# Altium PCB treehopper-mini.PcbDoc
Units mil, origin at the board's own origin, x right, y up, seen from the top; angles counter-clockwise.
Board outline 380 x 800 mil, 2 copper layers (Top Layer, Bottom Layer), stack 34.3 mil thick; 14 components, 21 nets, 94 pads, 39 vias.
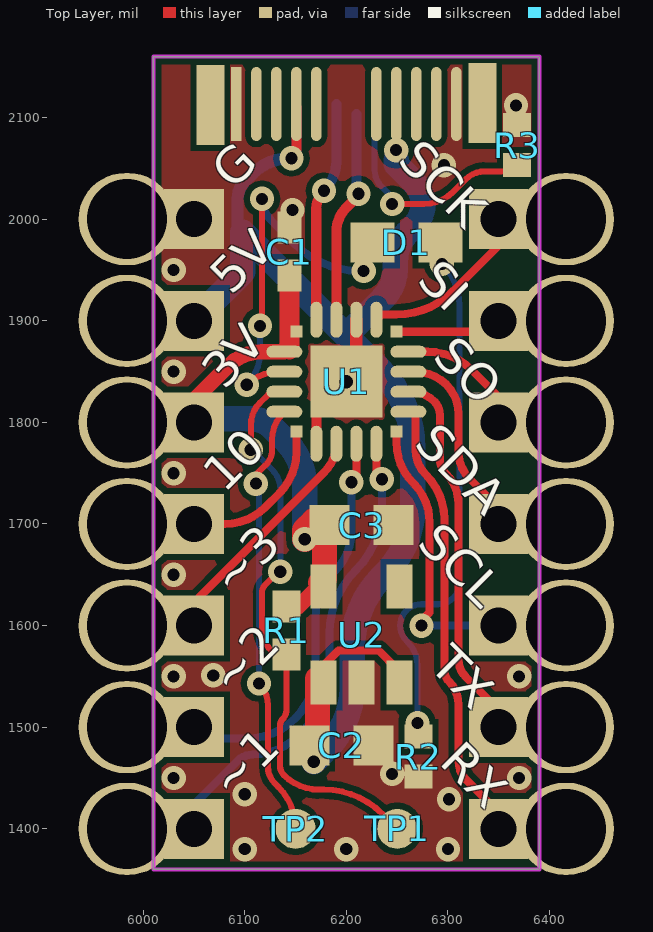
[diagram p0: Top Layer view]
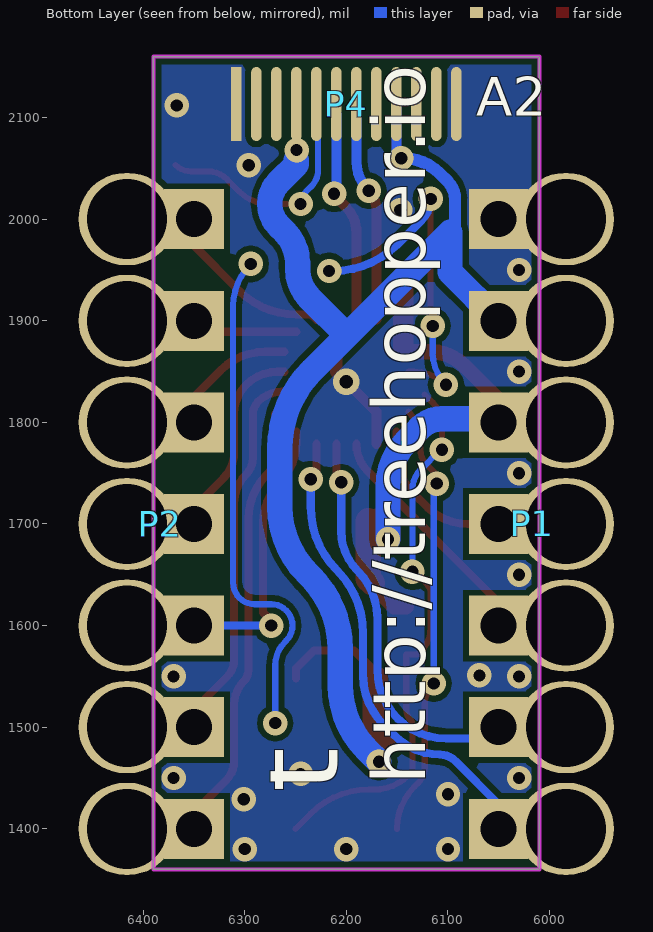
[diagram p1: Bottom Layer view, seen from below]

## Layer stack, top to bottom
Top Solder: solder mask 0.4, Solder Resist, Dk 3.5
Top Layer: signal copper 1.4
Dielectric 1: dielectric 31.5, FR-4, Dk 4.8
Bottom Layer: signal copper 1.4
Bottom Solder: solder mask 0.4, Solder Resist, Dk 3.5

## Board outline
6010,1360 6390,1360 6390,2160 6010,2160

## Design rules (kind name [scope] priority, off if disabled: settings)
Clearance [All] p1: gap=6
ComponentClearance [All] p1: gap=0 collisioncheckmode=3 verticalgap=0 showdistances=FALSE
DiffPairsRouting [All] p1: maxlimit=10 minlimit=6 mostfreqgap=10 toplayer_minwidth=6 toplayer_maxwidth=15 toplayer_prefwidth=8 bottomlayer_minwidth=6 bottomlayer_maxwidth=15 bottomlayer_prefwidth=8 maxuncoupledlength=500
HoleSize [All] p1: absolutevalues=TRUE maxlimit=500 minlimit=12 maxpercent=80.000 minpercent=20.000
HoleToHoleClearance [All] p1: gap=0 allowstackedmicrovias=TRUE
MinimumSolderMaskSliver [All] p1: minsoldermaskwidth=0
PlaneConnect [All] p1: planeconnectstyle=Direct reliefexpansion=20 reliefentries=4 reliefconductorwidth=10 reliefairgap=10
PolygonConnect [All] p1: connectstyle=Direct reliefconductorwidth=10 reliefentries=4 polygonreliefangle="90 Angle" airgapwidth=10
RoutingVias [All] p1: holewidth=12 width=24 viastyle="Through Hole" minholewidth=12 minwidth=24 maxholewidth=28 maxwidth=50
SilkToSilkClearance [All] p1: silktosilkclearance=0
SilkToSolderMaskClearance [IsPad] p1: minsilkscreentomaskgap=0 clearancetoexposedcopper=TRUE
SolderMaskExpansion [All] p1: expansion=0
Width [All] p1: maxlimit=500 minlimit=6 preferedwidth=8
22 further rules are at their usual default settings.

## Classes and differential pairs
differential pair USB_D: +USB_D_P -USB_D_N

## Components (designator, comment, footprint, x,y, rotation, side; value= is the part's Value field where it differs from the comment)
C1 "100n" CAPC1005N 6144,1968 r270 top
C2 "4u7" CAPC1608N 6195,1482 r180 top
C3 "10u" CAPC1608N 6215,1699 r180 top
D1 "GREEN" LTST-C190GKT_NO_SILK 6259,1977 r0 top
P1 "Header 7" HDR1X7_CASTELATED 6050,1400 r90 bottom
P2 "Header 7" HDR1X7_CASTELATED 6350,2000 r270 bottom
P4 "12401562E4#2A" 12401562E4#2A 6200,2195 r0 bottom
R1 "1k" RESC1005N#1 6141,1595 r90 top
R2 "1k" RESC1005N#2 6271,1471 r90 top
R3 "5k1" RESC1005N#2 6368,2073 r270 top
TP1 "TESTPOINT" TESTPOINT100 6250,1400 r0 top
TP2 "TESTPOINT" TESTPOINT100 6150,1400 r0 top
U1 "EFM8UB10F16G-B-QFN20" QFN50P300X300X90-20N-NO-SILK 6200,1840 r270 top
U2 "AP2112K-3.3" SOT23-5AN-no-silk 6215,1591 r90 top

## Footprints (in the part's own frame and the unit in brackets; to place one, negate y for a bottom-side part, rotate by r counter-clockwise, add the part's x,y. Pads: shape width x height; smd on the part's side, far side on the other; paste and mask are expansions set on the pad)
12401562E4#2A [mm]
  rect 0.26x1.85 smd: A1(2.75,2.075)
  oval 0.26x1.85 smd: A2(2.25,2.075) A3(1.75,2.075) A4(1.25,2.075) A5(0.75,2.075) A6(0.25,2.075) A7(-0.25,2.075) A8(-0.75,2.075) A9(-1.25,2.075) A10(-1.75,2.075) A11(-2.25,2.075) A12(-2.75,2.075)
  rect 0.26x1.85 smd far side: B1(-2.75,2.075)
  oval 0.26x1.85 smd far side: B2(-2.25,2.075) B3(-1.75,2.075) B4(-1.25,2.075) B5(-0.75,2.075) B8(0.75,2.075) B9(1.25,2.075) B10(1.75,2.075) B11(2.25,2.075) B12(2.75,2.075)
  rect 0.7x2 smd far side: MH1(3.4,2.05) MH2(-3.4,2.1)
  body extent -4.5,-9.8 4.5,5.8, height 1.05
CAPC1005N [mm] "Chip Capacitor (0402), Body 1.0x0.5mm, IPC Medium Density"
  rect 0.8x0.6 smd: 1(-0.6,0) 2(0.6,0)
  body extent -0.5,-0.3 0.5,0.3, height 0.2
CAPC1608N [mm] "Chip Capacitor (0603), Body 1.6x0.8mm, IPC Medium Density"
  rect 1x1 smd: 1(-0.8,0) 2(0.8,0)
  body extent -1,-0.39 1,0.39, height 0.79
HDR1X7_CASTELATED [mil] "Connector; Header; 7 Position"
  oval 90.55x95 hole 78.74: 1(0,-66) 2(100,-66) 3(200,-66) 4(300,-66) 5(400,-66) 6(500,-66) 7(600,-66)
  rect 59x59 hole 35.43: 1(0,0) 2(100,0) 3(200,0) 4(300,0) 5(400,0) 6(500,0) 7(600,0)
LTST-C190GKT_NO_SILK [mm] "Blue LED, 0603"
  rect 1.1x1 smd: 1(-0.85,0) 2(0.85,0)
  body extent -0.85,-0.45 0.85,0.45, height 0.9
QFN50P300X300X90-20N-NO-SILK [mm] "QFN, 16+4 Leads, Body 3.00x3.00mm, Pitch 0.50mm, IPC Medium Density"
  rect 0.3x0.3 smd: 1(-1.25,1.25) 6(-1.25,-1.25) 11(1.25,-1.25) 16(1.25,1.25)
  oval 0.9x0.3 smd: 2(-1.55,0.75) 3(-1.55,0.25) 4(-1.55,-0.25) 5(-1.55,-0.75) 12(1.55,-0.75) 13(1.55,-0.25) 14(1.55,0.25) 15(1.55,0.75)
  oval 0.3x0.9 smd: 7(-0.75,-1.55) 8(-0.25,-1.55) 9(0.25,-1.55) 10(0.75,-1.55) 17(0.75,1.55) 18(0.25,1.55) 19(-0.25,1.55) 20(-0.75,1.55)
  rect 1.8x1.8 smd mask+0: 21(0,0)
  body extent -1.5,-1.5 1.5,1.5, height 0.92
RESC1005N#1 [mm] "Chip Resistor, Body 1.1x0.5mm, IPC Medium Density"
  rect 0.8x0.7 smd: 1(-0.6,0) 2(0.6,0)
  body extent -0.5,-0.25 0.5,0.25, height 0.38
RESC1005N#2 [mm] "Chip Resistor, Body 1.1x0.5mm, IPC Medium Density"
  rect 0.6x0.7 smd: 1(-0.5,0) 2(0.5,0)
  body extent -0.5,-0.25 0.5,0.25, height 0.38
SOT23-5AN-no-silk [mm] "SOT23, 5-Leads, Body 2.9x1.6mm, Pitch 0.95mm, Lead Span 2.8mm, IPC Medium Density"
  rect 1.1x0.65 smd: 1(-1.2,0.95) 2(-1.2,0) 3(-1.2,-0.95) 4(1.2,-0.95) 5(1.2,0.95)
  body extent -1.5,-1.5 1.5,1.5, height 1.3
TESTPOINT100 [mm] "Testpoint, 1mm"
  round 1 smd paste-1: 1(0,0)

## Part data
C1: library part "Cap Semi", "Capacitor (Semiconductor SIM Model)"
C2 C3: library part "Cap Semi", "CAP SEMI 4U7 10V 0603"
D1: library part LED_GREEN, "Typical greenGaAs LED"
P1 P2: "Header, 7-Pin"
P4: "USB TYPE C PLUG"
R1 R2 R3: library part "Res Semi", "Semiconductor Resistor"
TP1 TP2: "Testpoint"
U1: "IC MCU 16KB 20QFN"
U2: "AP2112 IC REG LDO 3.3V 0.6A SOT25"

## Via types
v1: diameter 24, hole 12, Top Layer to Bottom Layer, tented both sides, 38 vias
v2: diameter 25.98, hole 12.99, Top Layer to Bottom Layer, tented both sides, 1 vias

## Nets (pads, with @x,y where several pads share a name; then routed paths per layer and width w, separated by ;. In a path a pad name is that pad's centre, name@x,y a point inside that pad or via, vN(x,y) a via of type N, cw(c..) or ccw(c..) an arc to the next point about the centre after c; other vN are vias at no path point)
3V3: C1.2 C3.2 P1.5 R1.2 U1.6 U1.7 U2.5 | length 548.3
  Top Layer w8: C3.2@6168,1703 C3.2@6178.5,1703
  Top Layer w15: P1.5@6050,1800 6050,1821.85 6083.96,1855.82 ; 6083.98,1855.83 cw(c6117,1822.78) 6117,1869.5 U1.7@6138.95,1869.5 ; U1.7@6138.98,1872 U1.7@6144,1872 ; R1.2 6152.98,1618.62 6174.6,1640.24 6174.6,1642.24 U2.5@6176.6,1642.24
  Top Layer w20: U1.7@6144,1872 C1.2
  Top Layer w25: v1(6159,1685) 6159,1694 C3.2@6168,1703 ; U2.5@6174.6,1642.24 6178.5,1646.15 C3.2@6178.5,1703
  Bottom Layer w25: P1.5@6050,1800 6053.5,1803.5 6106,1803.5 cw(c6106,1773) 6127.55,1794.58 ; 6127.57,1794.57 6140,1782.13 cw(c6094.13,1736.26) 6159,1736.26 v1(6159,1685)
5V: C2.2 P1.6 P4.A4 P4.A9 P4.B4 P4.B9 U2.1 U2.3 | length 1346.6
  Top Layer w8: U2.1@6174.6,1547.76 6174.6,1557.6 6192.41,1575.41 6231.94,1575.41 6249.4,1557.95 U2.3@6249.4,1547.76
  Top Layer w10: v1@6150.78,2068.78 P4.B4@6150.78,2110.31
  Top Layer w12: v1@6142,2060 v1(6146,2060)
  Top Layer w20: P1.6@6050,1900 P1.6@6064,1914
  Top Layer w25: C2.2@6163.5,1488 6171.6,1496.09 U2.1@6171.6,1547.76
  Bottom Layer w10: v1(6146,2060) 6150.79,2064.79 P4.A9@6150.79,2110.31
  Bottom Layer w12: 6093,1978 6093,2020 cw(c6117,2020) 6100.03,2036.97 6108.03,2044.97 cw(c6144.31,2008.69) 6144.31,2060 v1(6146,2060)
  Bottom Layer w25: P1.6@6050,1900 6098,1948 6098,1969 ; v1(6168,1466) 6179.5,1477.5 ccw(c6115.52,1541.48) 6206,1541.48 6206,1576.93 cw(c6307.57,1576.93) 6235.75,1648.75 6238.28,1651.28 ccw(c6172.55,1717) 6265.5,1717 6265.5,1774.25 ccw(c6156.25,1774.25) 6233.54,1851.46 ccw(c6156.25,1774.25) 6233.5,1851.5 6199.5,1885.5 ; v1@6249.24,2058.25 6249.24,2053.92 6266.54,2036.62 cw(c6244.92,2015) 6275.5,2015 cw(c6245,2015) 6266.58,1993.45 ; 6266.57,1993.43 6260.57,1987.43 ccw(c6290.91,1957.09) 6248,1957.09 6248,1951 cw(c6206.96,1951) 6235.98,1921.98 6199.5,1885.5 ; 6098,1969 6098,1987 6107,1978 ; 6098,1969 6107,1978 ; 6107,1978 6199.5,1885.5
  other v1: 6249,2068
C2CK: R1.1 TP1.1 U1.9 | length 547.7
  Top Layer w6: v1@6106,1770.36 v1(6106,1773) 6106,1797.66 cw(c6136.73,1797.66) 6114.98,1819.37 ; 6115,1819.39 U1.9@6123,1827.39 ; v1(6135,1653) ccw(c6135,1648.47) 6131.79,1651.67 6120.12,1640 ccw(c6127.66,1632.46) 6117,1632.46 6117,1598.14 ccw(c6151.14,1598.14) 6127,1574 ccw(c6133.33,1580.33) 6133.33,1571.38 R1.1 6141,1516.96 cw(c6128.04,1516.96) 6137.21,1507.8 ccw(c6142.96,1502.04) 6134.82,1502.04 6134.82,1461.41 ccw(c6146.71,1461.41) 6138.29,1453.01 ccw(c6173.24,1487.94) 6173.24,1438.53 6178,1438.53 cw(c6178,1357.72) 6235.14,1414.86 TP1.1
  Bottom Layer w6: v1(6106,1773) 6107.4,1773 6126.94,1753.46 cw(c6107.49,1734) 6135,1734 v1(6135,1653)
C2D: TP2.1 U1.10 | length 431
  Top Layer w6: v1(6111,1739.7) 6111,1748.3 6120.85,1758.15 ccw(c6106,1773) 6127,1773 6127,1783 cw(c6164.41,1783) 6137.95,1809.45 U1.10 ; v1(6114,1543) cw(c6092.71,1521.71) 6122.82,1521.71 6122.82,1461 ccw(c6145.72,1461) 6129.53,1444.8 6133,1441.33 ; 6133.03,1441.3 cw(c6091.96,1400.29) 6150,1400.29 TP2.1
  Bottom Layer w6: v1(6111,1739.7) 6114,1736.7 v1(6114,1543)
CC1: P4.A5 R3.2 | length 230.2
  Top Layer w6: v1(6245,2015) 6276.25,2015 ccw(c6276.25,2055.97) 6305.22,2027 6317.59,2039.38 cw(c6336,2020.97) 6336,2047 6352.75,2047 ccw(c6352.75,2068.56) R3.2
  Bottom Layer w6: P4.A5@6229.52,2103.31 6227.74,2101.53 6227.74,2049.01 ccw(c6252.01,2049.01) 6234.83,2031.87 6245,2021.7 v1(6245,2015)
GND: C1.1 C2.1 C3.1 P1.7 P4.A1 P4.A12 P4.B1 P4.B12 R2.1 R3.1 U1.3 U1.12 U1.21 U2.2 | length 138.4
  Top Layer w10: U1.12 6170.47,1810.47 U1.21@6205,1845
  Top Layer w12: U1.21@6205,1845 6209.84,1849.84 U1.3
  other v1: 6100,1380 6200,1380 6300,1380 6301,1429 6100,1434 6030,1450 6370,1450 6245,1454 6030,1550 6370,1550 6069,1551 6030,1650 6030,1750 6030,1850 6030,1950 6147,2009 6296,2053 6367,2112
  other v2: 6200,1840
LED: D1.1 U1.8 | length 361.1
  Top Layer w6: v1(6102,1837) cw(c6133,1806) 6133,1849.84 U1.8 ; v1(6115,1895) 6117,1897 v1(6117,2020)
  Bottom Layer w6: v1(6102,1837) ccw(c6070.62,1868.38) 6115,1868.38 v1(6115,1895)
  Bottom Layer w8: v1@6119,2020 v1(6117,2020) ccw(c6146.24,2020) 6125.56,1999.32 6149.64,1975.24 ccw(c6213,2038.6) 6213,1949 v1(6217,1949)
MISO: P2.2 U1.1 | length 105.3
  Top Layer w8: U1.1 6339.21,1889.21 P2.2@6350,1900
MOSI: P2.3 U1.20 | length 129.8
  Top Layer w8: U1.20 6280,1869.53 cw(c6280,1808.03) 6323.48,1851.52 6350,1825 P2.3@6350,1800
NetD1_2: D1.2 R2.2 | length 501.7
  Bottom Layer w6: v1(6270,1504) 6270,1560.59 ccw(c6236.89,1560.59) 6260.31,1583.99 6259.15,1585.15 cw(c6274,1600) 6253,1600 cw(c6274,1600) 6259.15,1614.84 6259.3,1615 cw(c6273.79,1600.51) 6273.79,1621 6290.18,1621 ccw(c6290.18,1642.29) 6305.22,1627.22 ; v1(6294,1956) cw(c6251.82,1913.82) 6311.47,1914.53 cw(c6251.82,1913.82) 6311.47,1913.82 6311.47,1642.29 cw(c6290.18,1642.29) 6305.25,1627.25
P1.2: P1.4 U1.11 | length 159.2
  Top Layer w8: P1.4@6050,1700 6080.37,1700 ccw(c6080.37,1756.63) 6120.41,1716.59 6134,1730.17 ccw(c6093.47,1770.7) 6150.79,1770.7 U1.11
PWM1: P1.1 U1.15 | length 464.1
  Top Layer w8: U1.15 6229.53,1749.47 v1(6235,1744)
  Bottom Layer w8: P1.1@6050,1400 6050,1424 6092.71,1466.71 cw(c6107.85,1451.57) 6107.85,1472.98 ccw(c6107.85,1535.58) 6123.01,1474.84 ccw(c6107.85,1535.58) 6152.09,1491.3 6163.4,1502.6 ccw(c6114.87,1551.13) 6183.5,1551.13 6183.5,1592.29 cw(c6271.42,1592.29) 6209.25,1654.45 ccw(c6147.08,1716.62) 6235,1716.62 v1(6235,1744)
PWM2: P1.2 U1.14 | length 396.7
  Top Layer w8: v1(6205,1741) 6209.84,1745.84 U1.14
  Bottom Layer w8: P1.2@6050,1500 6061.22,1488.78 6101.7,1488.78 ccw(c6101.7,1556.58) 6149.64,1508.64 ccw(c6101.7,1556.58) 6169.5,1556.58 6169.5,1606.92 cw(c6236.08,1606.92) 6189,1654 ccw(c6150.37,1692.63) 6205,1692.63 v1(6205,1741)
PWM3: P1.3 U1.13 | length 235.4
  Top Layer w8: P1.3@6050,1600 6050,1622.85 6178.86,1751.71 ccw(c6151.59,1778.98) 6184.22,1758.42 ccw(c6151.59,1778.98) 6186.38,1762.33 ccw(c6151.59,1778.98) U1.13
RX: P2.7 U1.17 | length 433.6
  Top Layer w8: U1.17@6270,1808 6268.25,1806.25 6268.25,1772.54 ccw(c6301.54,1772.54) 6278,1749 cw(c6233.4,1704.4) 6296.47,1704.4 6296.47,1555.93 ccw(c6311.93,1555.93) 6301,1545 cw(c6278.13,1522.13) 6310.47,1522.13 6310.47,1466.33 ccw(c6336.55,1466.33) 6318.11,1447.89 6338.69,1427.31 cw(c6311.37,1400) P2.7@6350,1400
SCK: P2.1 U1.2 | length 173.3
  Top Layer w8: U1.2 6234.62,1906.12 6249,1906.12 ccw(c6249,1986.07) 6305.51,1929.51 ; 6305.54,1929.54 6350,1974 P2.1@6350,2000
SCL: P2.5 U1.16 | length 278.9
  Top Layer w8: U1.16 6249.21,1780.53 ccw(c6306.53,1780.53) 6266,1740 cw(c6227.37,1701.37) 6282,1701.37 6282,1612.94 6274,1604.94 v1(6274,1600)
  Bottom Layer w8: v1(6274,1600) P2.5@6350,1600
SDA: P2.4 U1.19 | length 194.4
  Top Layer w8: U1.19 6267.62,1849.84 cw(c6267.62,1806) 6298.63,1837 cw(c6270.03,1808.4) 6310.47,1808.4 6310.47,1770.42 ccw(c6346.42,1770.42) 6310.74,1766.07 ccw(c6346.42,1770.42) 6321,1745 6338.69,1727.31 cw(c6311.37,1700) P2.4@6350,1700
TX: P2.6 U1.18 | length 368.7
  Top Layer w8: U1.18 6263.55,1830.16 cw(c6263.55,1797.55) 6286.61,1820.61 cw(c6273.59,1807.59) 6292,1807.59 6292,1764.46 ccw(c6313.64,1764.46) 6298.34,1749.16 cw(c6269.04,1719.87) 6304.92,1740.59 cw(c6269.04,1719.87) 6310.47,1719.87 6310.47,1566.33 ccw(c6334.14,1566.33) 6317.4,1549.6 6337.98,1529.02 cw(c6308.96,1500) P2.6@6350,1500
USB_D_N: P4.A7 U1.5 | length 221.3
  Top Layer w0: U1.5@6170.31,1901.18 U1.5
  Top Layer w10: U1.5@6170.31,1901.18 6170.31,2009.45 cw(c6196.55,2009.45) 6170.32,2010.11 cw(c6196.55,2009.45) v1(6178,2028)
  Bottom Layer w10: v1@6177.41,2028.59 6176.82,2028 6178,2026.82 v1(6178,2028) ccw(c6148.65,2057.35) 6183.27,2034.46 ccw(c6148.65,2057.35) 6190.15,2056.58 ccw(c6148.65,2057.35) 6190.16,2057.35 P4.A7
USB_D_P: P4.A6 U1.4 | length 210.7
  Top Layer w10: U1.4 6190.16,1988.09 cw(c6222.91,1988.09) 6190.31,1991.3 cw(c6222.91,1988.09) 6199.75,2011.25 6210.94,2022.44 ccw(c6208.38,2025) v1(6212,2025)
  Bottom Layer w10: P4.A6@6209.84,2103.31 6209.84,2027.16 v1(6212,2025)
pads on no net: P4.A2 P4.A3 P4.A8 P4.A10 P4.A11 P4.B2 P4.B3 P4.B5 P4.B8 P4.B10 P4.B11 P4.MH1 P4.MH2 U2.4

## Polygon pours and split planes (outlines as drawn)
GND on Top Layer "BottomGnd" (solid, remove dead copper, pour order 8): 6010,2160 6390,2160 6390,1360 6010,1360
GND on Bottom Layer "BottomGnd" (solid, remove dead copper, pour order 9): 6010,2160 6390,2160 6390,1360 6010,1360

## Keep-outs
Keep-Out Layer:
  the board outline again, w3.94

## Silkscreen, mask and mechanical layers (free items; w line width, h text height)
Top Overlay:
  text "SCK" at 6241,2048 h60 r315
  text "G" at 6097,2019 h60 r45
  text "SI" at 6260,1930 h60 r315
  text "5V" at 6095,1916 h60 r45
  text "SO" at 6275,1855 h60 r315
  text "3V" at 6089,1823 h60 r48
  text "SDA" at 6257,1769 h60 r315
  text "10" at 6088,1721 h60 r45
  text "SCL" at 6260,1671 h60 r315
  text "~3" at 6096,1619 h60 r45
  text "TX" at 6272,1551 h60 r315
  text "~2" at 6095,1521 h60 r45
  text "RX" at 6282,1456 h60 r315
  text "~1" at 6095,1419 h60 r45
Bottom Overlay:
  text "A2" at 6072,2089 h65
  text "http://treehopper.io" at 6105,1444 h90 r270
  text "t" at 6182,1436 h140 r270